# Altium PCB DS141-1.0循环式二氧化碳.PcbDoc
Units mm, origin at the board's own origin, x right, y up, seen from the top; angles counter-clockwise.
Board outline 42.01 x 51.21 mm, 2 copper layers (Top Layer, Bottom Layer), stack 1.581 mm thick; 36 components, 39 nets, 162 pads, 42 vias.
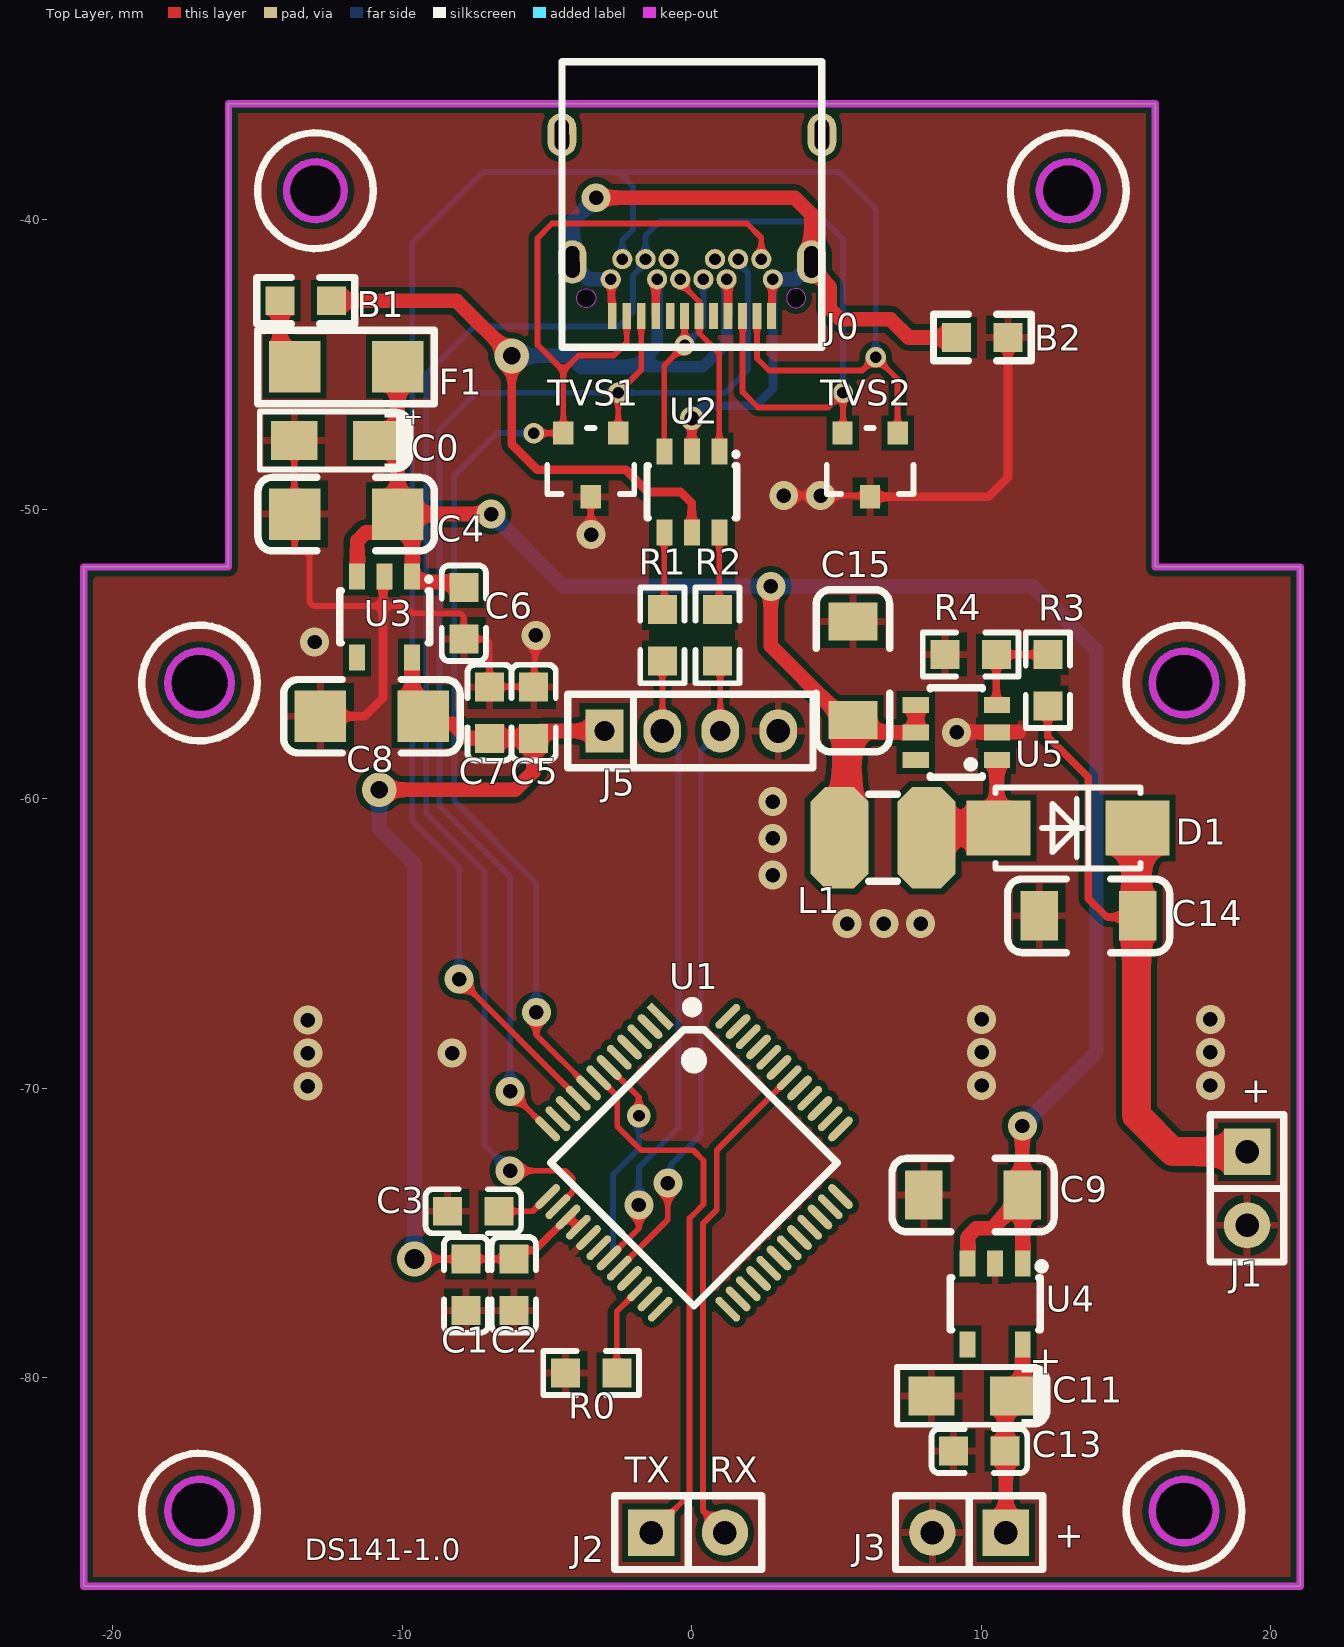
[diagram p0: Top Layer view]
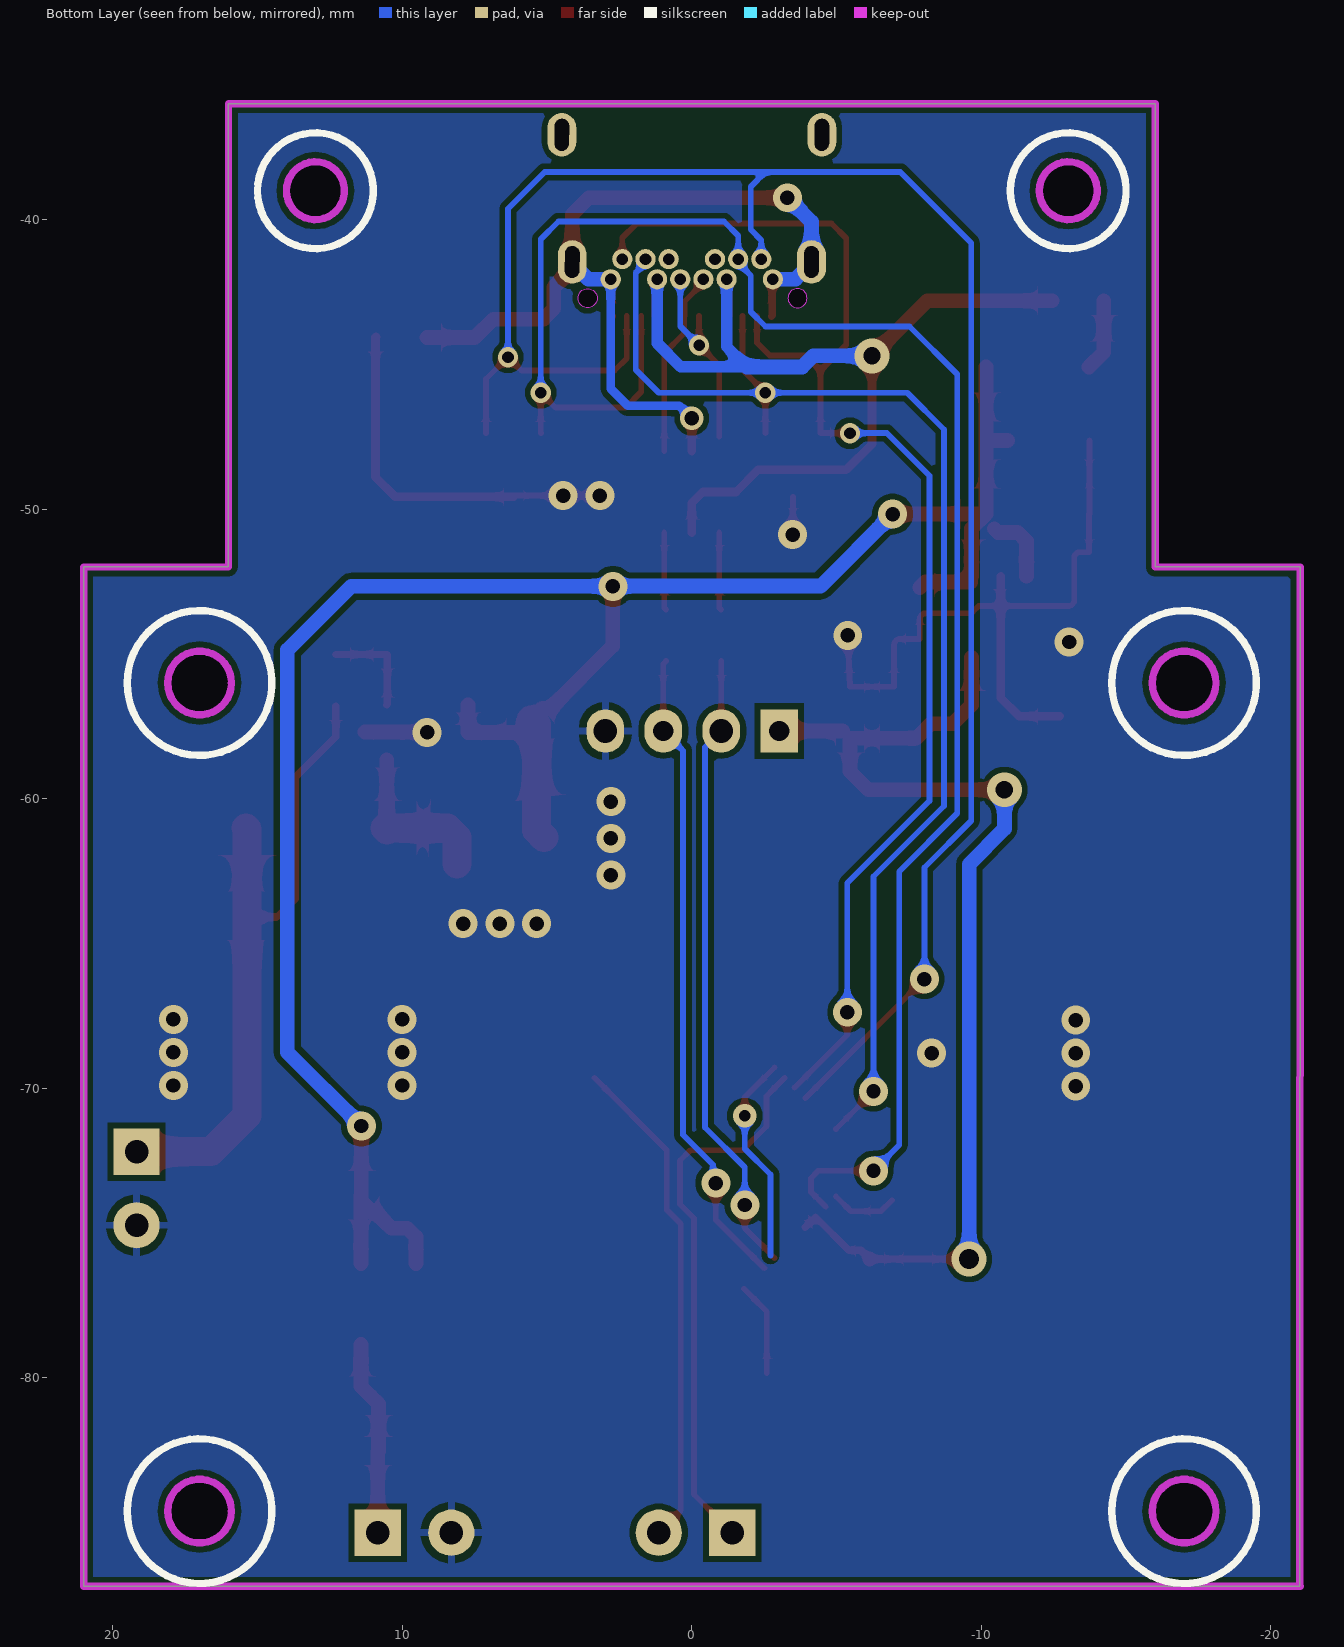
[diagram p1: Bottom Layer view, seen from below]
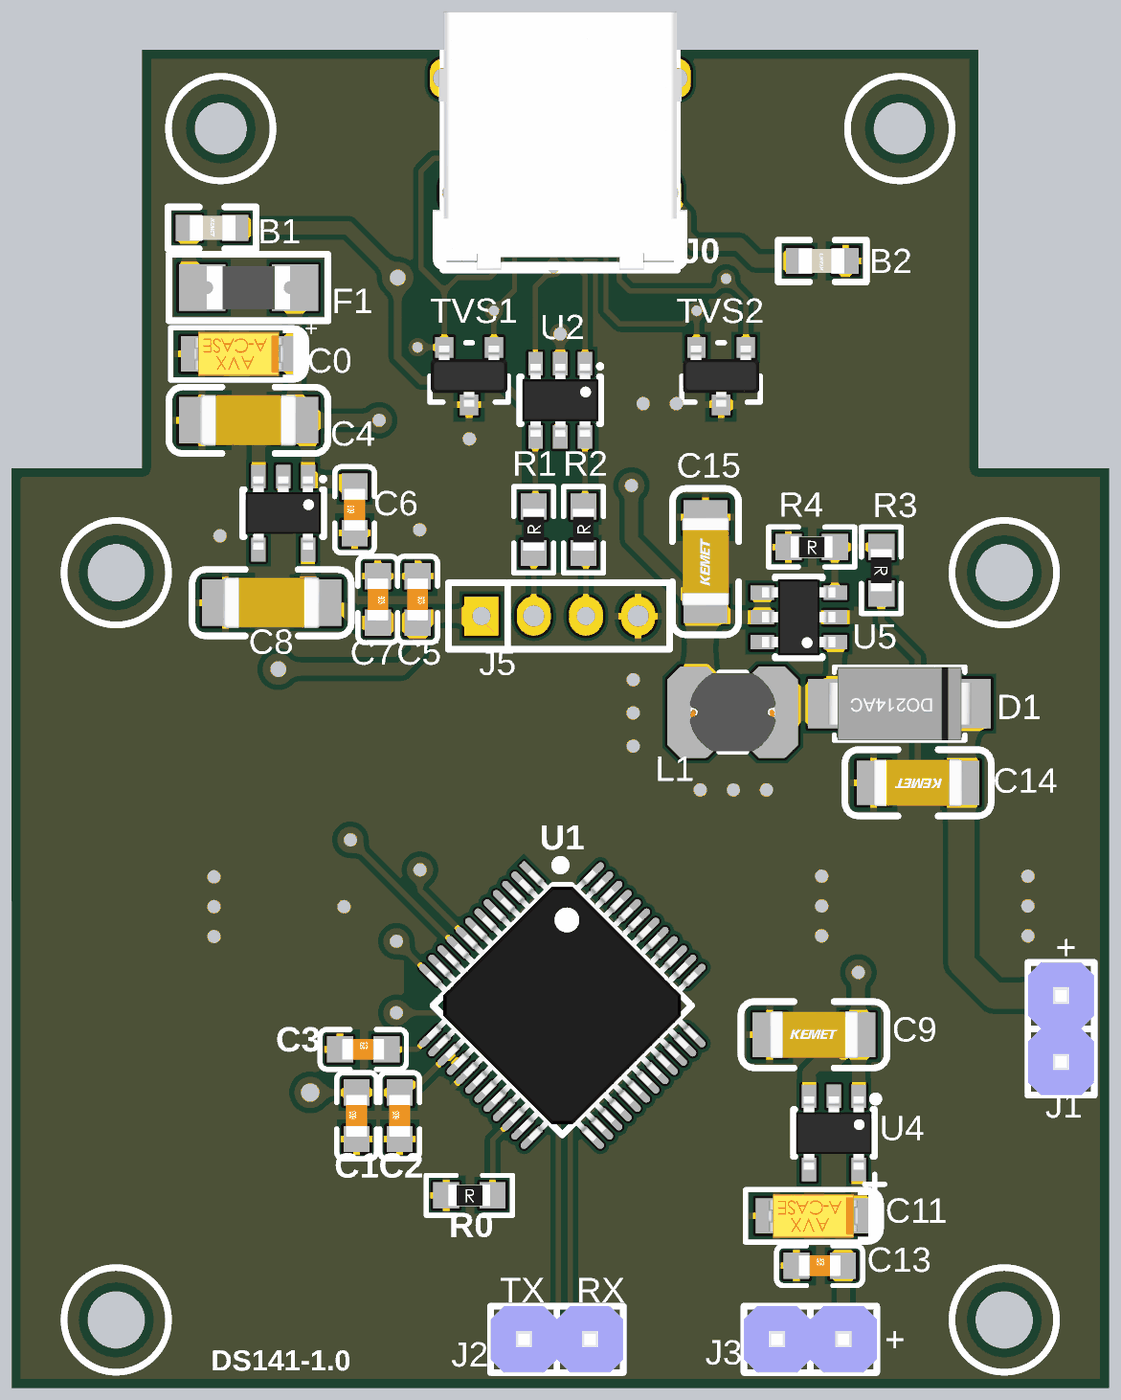
[diagram p2: 3D render of the assembled board from above, using the file's embedded part models]

## Layer stack, top to bottom
Top Solder: solder mask 0.0102, Solder Resist, Dk 3.5
Top Layer: signal copper 0.0356
Dielectric 1: dielectric 1.51, FR-4, Dk 4.8
Bottom Layer: signal copper 0.0356
Bottom Solder: solder mask 0.0102, Solder Resist, Dk 3.5

## Board outline
-21,-87.2 -21.006,-51.994 -16.002,-51.994 -16.002,-35.992 16.002,-35.992 16.002,-51.994 21.006,-51.994 21.006,-87.2
cut-out: 15.9,-84.6 ccw(c17,-84.6) 17,-85.7 ccw(c17,-84.6) 18.1,-84.6 ccw(c17,-84.6) 17,-83.5 ccw(c17,-84.6)
cut-out: 12,-39 ccw(c13,-39) 13,-40 ccw(c13,-39) 14,-39 ccw(c13,-39) 13,-38 ccw(c13,-39)
cut-out: -13,-40 ccw(c-13,-39) -12,-39 ccw(c-13,-39) -13,-38 ccw(c-13,-39) -14,-39 ccw(c-13,-39)
cut-out: -18.1,-84.6 ccw(c-17,-84.6) -17,-85.7 ccw(c-17,-84.6) -15.9,-84.6 ccw(c-17,-84.6) -17,-83.5 ccw(c-17,-84.6)
cut-out: 18.1,-56 ccw(c17,-56) 17,-54.9 ccw(c17,-56) 15.9,-56 ccw(c17,-56) 17,-57.1 ccw(c17,-56)
cut-out: -18.1,-56 cw(c-17,-56) -17,-54.9 cw(c-17,-56) -15.9,-56 cw(c-17,-56) -17,-57.1 cw(c-17,-56)

## Design rules (kind name [scope] priority, off if disabled: settings)
Clearance [All] p1: gap=0.2 ignorepadtopadclearanceinfootprint=TRUE
MinimumSolderMaskSliver [All] p1: minsoldermaskwidth=0.102
PolygonConnect GND [All] p1: thpad.connectstyle=Relief thpad.reliefconductorwidth=0.254 thpad.reliefentries=4 thpad.polygonreliefangle="90 Angle" thpad.airgapwidth=0.254 smdpad.connectstyle=Relief smdpad.reliefconductorwidth=0.254 smdpad.reliefentries=4 smdpad.polygonreliefangle="90 Angle" smdpad.airgapwidth=0.254 via.connectstyle=Direct via.reliefconductorwidth=0.254 via.reliefentries=4 via.polygonreliefangle="90 Angle" via.airgapwidth=0.254
PolygonConnect VSS [InNet('VSS') vs InNet('VSS')] p2: thpad.connectstyle=Relief thpad.reliefconductorwidth=0.508 thpad.reliefentries=4 thpad.polygonreliefangle="90 Angle" thpad.airgapwidth=0.254 smdpad.connectstyle=Relief smdpad.reliefconductorwidth=0.508 smdpad.reliefentries=4 smdpad.polygonreliefangle="90 Angle" smdpad.airgapwidth=0.254 via.connectstyle=Direct via.reliefconductorwidth=0.508 via.reliefentries=4 via.polygonreliefangle="90 Angle" via.airgapwidth=0.254
RoutingVias [All] p1: holewidth=0.6 width=1 viastyle="Through Hole" minholewidth=0.4 minwidth=0.8 maxholewidth=1 maxwidth=2
SilkToSilkClearance [All] p1: silktosilkclearance=0.025
SilkToSolderMaskClearance [IsPad] p1: minsilkscreentomaskgap=0.025 clearancetoexposedcopper=TRUE
SolderMaskExpansion [All] p1: expansion=0.102 istentingtop=FALSE
Width [All] p1: maxlimit=1 minlimit=0.2 preferedwidth=0.2
27 further rules are at their usual default settings.

## Components (designator, comment, footprint, x,y, rotation, side; value= is the part's Value field where it differs from the comment)
B1 "CBM160808U102" 0603Bead -13.335,-42.799 r180 top
B2 "CBM160808U102" 0603Bead 10.033,-44.069 r0 top
C0 "AVX_10uF/16V ±10％(C106)" AVX_3216-18(1206)_SMD -12.319,-47.625 r180 top value=10uF
C1 "SMDCAP00013" 0603CAP -7.798,-76.785 r90 top locked value=100nF
C2 "SMDCAP00012" 0603CAP -6.147,-76.785 r90 top locked value=4.7uF
C3 "SMDCAP00015" 0603CAP -7.544,-74.244 r0 top locked value=1uF
C4 "MLCC 10uF 50V ±20％ 1206" 1206CAP#1 -11.938,-50.165 r0 top value=10uF
C5 "SMDCAP00013" 0603CAP -5.461,-57.022 r270 top value=100nF
C6 "SMDCAP00015" 0603CAP -7.874,-53.593 r90 top value=1uF
C7 "SMDCAP00015" 0603CAP -6.985,-57.022 r270 top value=1uF
C8 "MLCC 10uF 50V ±20％ 1206" 1206CAP#1 -11.049,-57.149 r0 top value=10uF
C9 "MLCC 10uF 50V ±20％ 1206" 1206CAP#2 9.715,-73.685 r0 top value=10uF
C11 "AVX_10uF/16V ±10％(C106)" AVX_3216-18(1206)_SMD 9.69,-80.62 r180 top value=10uF
C13 "SMDCAP00015" 0603CAP 9.931,-82.525 r0 top value=1uF
C14 "MLCC 22uF 50V ±20％ 1206" 1206CAP#2 13.7,-64.041 r180 top value=22uF
C15 "MLCC 22uF 50V ±20％ 1206" 1206CAP#2 5.563,-55.577 r90 top value=22uF
D1 "SMDDIODE06003" SMA/DO-214AC 12.992,-61.011 r0 top value=SS12
F1 "SMD1206-050C-16V" 1206FUSE -11.938,-45.085 r0 top value="16V /0.5A"
J0 "USB_Type_C_24P" USB_TYPE_C_24P_Receptacle 0,-40.2 r180 top locked
J1 "SL000000042" SIP2 19.177,-73.457 r270 top value=NDIR-CO2-PWR
J2 "SL000000042" SIP2 -0.127,-85.344 r0 top value=NDIR-CO2-DAT
J3 "SL000000042" SIP2 9.576,-85.344 r180 top value=Motor
J5 "DIP4单排直针  间距2mm 针长11mm 铜" H4 -3.016,-57.658 r0 top value=4P
L1 "CD32 10uH 3.5*3*2mm SMD" CD32 6.604,-61.341 r90 top value=10uH
R0 "Chip 0R 1/16W ±1％ 0603" 0603RES -3.48,-79.832 r0 top locked value=0R
R1 "Chip 22R 1/16W ±1％ 0603" 0603RES -1.016,-54.356 r90 top value=22R
R2 "Chip 22R 1/16W ±1％ 0603" 0603RES 0.889,-54.356 r90 top value=22R
R3 "Chip 180K 1/16W ±1％ 0603" 0603RES 12.294,-55.905 r270 top value=180K
R4 "SMDRES00056" 0603RES 9.627,-55.016 r0 top value=10K
TVS1 "MMBZ9V1A" SOT23 -3.49,-48.471 r180 top
TVS2 "MMBZ9V1A" SOT23 6.157,-48.471 r180 top
U1 "STC32G12K128_35I LQFP48" LQFP-48 0.076,-72.568 r315 top locked value=STC32G12K128
U2 "82400102" SOT23-6 0,-49.4 r180 top
U3 "ME6211C33M5G-N" SOT23-5 -10.607,-53.717 r180 top
U4 "ME6211C33M5G-N" SOT23-5 10.477,-77.445 r180 top
U5 "MT3608B" SOT23-6 9.133,-57.709 r90 top

## Footprints (in the part's own frame and the unit in brackets; to place one, negate y for a bottom-side part, rotate by r counter-clockwise, add the part's x,y. Pads: shape width x height; smd on the part's side, far side on the other; paste and mask are expansions set on the pad)
0603Bead [mm]
  rect 1x1 smd: 1(-0.889,0) 2(0.889,0)
  silkscreen extent -1.69,-0.8 1.69,0.8, body extent -0.9,-0.48 0.85,0.48, height 0.95
0603CAP [mm]
  rect 1x1 smd: 1(-0.889,0) 2(0.89,0)
  silkscreen extent -1.65,-0.76 1.65,0.76, body extent -0.8,-0.4 0.8,0.4, height 0.3
0603RES [mm]
  rect 1x1 smd: 1(-0.889,0) 2(0.889,0)
  silkscreen extent -1.65,-0.76 1.65,0.76, body extent -0.8,-0.41 0.8,0.41, height 0.51
1206CAP#1 [mil]
  rect 70x70 smd: 1(-70,0) 2(70,0)
  silkscreen extent -120,-50 120,50, body extent -73,-38 73,38, height 47
1206CAP#2 [mil]
  rect 51.18x66.93 smd: 1(-66.93,0) 2(66.93,0)
  silkscreen extent -110,-50 110,50, body extent -67,-35 67,35, height 71
1206FUSE [mil]
  rect 70x70 smd: 1(-70,0) 2(70,0)
  silkscreen extent -120,-50 120,50, body extent -63,-33 63,33, height 57
AVX_3216-18(1206)_SMD [mm]
  rect 1.6x1.35 smd: 1(-1.41,0) 2(1.41,0)
  silkscreen extent -2.6,-1 2.6,1, body extent -1.7,-0.84 1.7,0.84, height 1.71
CD32 [mm]
  oct 3.5x2 smd: 1(0,1.5) 2(0,-1.5)
  silkscreen extent -1.5,-0.5 1.5,0.5, body extent -1.5,-1.65 1.5,1.65, height 2.1
H4 [mm]
  rect 1.3x1.5 hole 0.7: 1(0,0)
  oval 1.3x1.5 hole 0.813: 2(2,0) 4(6,0)
  oval 1.3x1.5 hole 0.7: 3(4,0)
  silkscreen extent -1.27,-1.27 7.2,1.27
LQFP-48 [mm]
  rect 1.1x0.27 smd mask+0.08: 1(-4.4,2.75)
  oval 1.1x0.27 smd mask+0.08: 2(-4.4,2.25) 3(-4.4,1.75) 4(-4.4,1.25) 5(-4.4,0.75) 6(-4.4,0.25) 7(-4.4,-0.25) 8(-4.4,-0.75) 9(-4.4,-1.25) 10(-4.4,-1.75) 11(-4.4,-2.25) 12(-4.4,-2.75) 25(4.4,-2.75) 26(4.4,-2.25) 27(4.4,-1.75) 28(4.4,-1.25) 29(4.4,-0.75) 30(4.4,-0.25) 31(4.4,0.25) 32(4.4,0.75) 33(4.4,1.25) 34(4.4,1.75) 35(4.4,2.25) 36(4.4,2.75)
  oval 0.27x1.1 smd mask+0.08: 13(-2.75,-4.4) 14(-2.25,-4.4) 15(-1.75,-4.4) 16(-1.25,-4.4) 17(-0.75,-4.4) 18(-0.25,-4.4) 19(0.25,-4.4) 20(0.75,-4.4) 21(1.25,-4.4) 22(1.75,-4.4) 23(2.25,-4.4) 24(2.75,-4.4) 37(2.75,4.4) 38(2.25,4.4) 39(1.75,4.4) 40(1.25,4.4) 41(0.75,4.4) 42(0.25,4.4) 43(-0.25,4.4) 44(-0.75,4.4) 45(-1.25,4.4) 46(-1.75,4.4) 47(-2.25,4.4) 48(-2.75,4.4)
  silkscreen extent -3.95,-3.5 3.5,3.85, body extent -4.51,-4.5 4.5,4.5, height 1.54
SIP2 [mm]
  rect 1.6x1.6 hole 0.813: 1(-1.27,0)
  round 1.6 hole 0.813: 2(1.27,0)
  silkscreen extent -2.54,-1.27 2.54,1.27, body extent -2.54,-1.27 2.54,1.27, height 8.64
SMA/DO-214AC [mm]
  rect 2.2x1.9 smd: 1(-2.4,0) 2(2.4,0)
  silkscreen extent -2.5,-1.4 2.5,1.4, body extent -2.74,-1.4 2.74,1.4, height 2.28
SOT23 [mm]
  rect 0.7x0.8 smd: 1(-0.95,-1.1) 2(0.95,-1.1) 3(0,1.1)
  silkscreen extent -1.5,-1.27 1.5,1, body extent -1.46,-1.17 1.46,1.17, height 1
SOT23-5 [mm] "SOT-23/SC-74A; 5 Leads; Body 3.1 x 3 mm, inc. leads (LxW max)"
  rect 0.55x0.9 smd: 1(-0.95,-1.4) 2(0,-1.4) 3(0.95,-1.4) 4(0.95,1.4) 5(-0.95,1.4)
  silkscreen extent -1.59,-1.36 1.55,0.9, body extent -1.45,-1.4 1.45,1.4, height 1.45
SOT23-6 [mm] "SOT-23/SC-74A; 5 Leads; Body 3.1 x 3 mm, inc. leads (LxW max)"
  rect 0.55x0.9 smd: 1(-0.95,-1.4) 2(0,-1.4) 3(0.95,-1.4) 4(0.95,1.4) 5(0,1.4) 6(-0.95,1.4)
  silkscreen extent -1.59,-1.36 1.55,0.9, body extent -1.45,-1.4 1.45,1.4, height 1.45
USB_TYPE_C_24P_Receptacle [mm]
  oval 1x1.5 hole 0.5 slot 1.1 at 90.5 deg: 0(-4.49,-3.13) 0(-4.13,1.26) 0(4.13,1.26) 0(4.49,-3.13)
  rect 0.3x0.9 smd mask+0.1: A1(-2.75,3.13) A2(-2.25,3.13) A3(-1.75,3.13) A4(-1.25,3.13) A5(-0.75,3.13) A6(-0.25,3.13) A7(0.25,3.13) A8(0.75,3.13) A9(1.25,3.13) A10(1.75,3.13) A11(2.25,3.13) A12(2.75,3.13)
  round 0.7 hole 0.4: B1(2.8,1.86) B2(2.4,1.16) B3(1.6,1.16) B4(1.2,1.86) B5(0.8,1.16) B6(0.4,1.86) B7(-0.4,1.86) B8(-0.8,1.16) B9(-1.2,1.86) B10(-1.6,1.16) B11(-2.4,1.16) B12(-2.8,1.86)
  Keep-Out Layer board cut-out: 3.98,2.51 3.955,2.384 3.883,2.277 3.776,2.205 3.65,2.18 3.65,2.18 3.524,2.205 3.417,2.277 3.345,2.384 3.32,2.51 3.32,2.51 3.345,2.636 3.417,2.743 3.524,2.815 3.65,2.84 3.65,2.84 3.776,2.815 3.883,2.743 3.955,2.636 3.98,2.51
  Keep-Out Layer board cut-out: -3.93,2.51 -3.905,2.384 -3.833,2.277 -3.726,2.205 -3.6,2.18 -3.6,2.18 -3.474,2.205 -3.367,2.277 -3.295,2.384 -3.27,2.51 -3.27,2.51 -3.295,2.636 -3.367,2.743 -3.474,2.815 -3.6,2.84 -3.6,2.84 -3.726,2.815 -3.833,2.743 -3.905,2.636 -3.93,2.51
  silkscreen extent -4.48,-5.66 4.48,4.21, body extent -4.87,-5.66 4.88,4.21, height 3.36

## Part data
B1 B2: library part "Chip Ferrite Bead 0606", "贴片磁珠"
C0 C11: "钽电容"
C1 C5: library part "MLCC 100nF 50V ±10％ 0603", "贴片电容"
C2: library part "MLCC 4.7uF 50V ±10％ 0603", "贴片电容"
C3 C6 C7 C13: library part "MLCC 1uF 50V ±10％ 0603", "贴片电容"
C4 C8 C9 C14 C15: "贴片电容"
D1: library part "SS12 SMA/DO-214AC（1N5817）", "贴片肖特基二极管"
F1: "贴片自恢复保险丝 16V /0.5A"
J1 J2 J3: library part "DIP2 单排直针 1*40P 间距2.54mm 针长11mm 铜", "单排直针"
J5: "单排直针"
L1: "贴片电感"
R0 R1 R2 R3: "贴片电阻"
R4: library part "Chip 10K 1/16W ±1％ 0603", "贴片电阻"
TVS1 TVS2: library part TVS, "瞬态抑制二极管"
U1: "单片机芯片"
U2: "瞬态抑制二极管(TVS)"
U3 U4: "稳压芯片"
U5: "MT3608B 是一款高效的1.2MHz固定频率电流模式升压转换器。"

## Via types
v1: diameter 1, hole 0.5, Top Layer to Bottom Layer, tented both sides, 32 vias
v2: diameter 0.7, hole 0.4, Top Layer to Bottom Layer, tented both sides, 5 vias
v3: diameter 1.2, hole 0.6, Top Layer to Bottom Layer, tented both sides, 2 vias
v4: diameter 0.813, hole 0.406, Top Layer to Bottom Layer, tented both sides, 1 vias
v5: diameter 1.2, hole 0.7, Top Layer to Bottom Layer, tented both sides, 1 vias
v6: diameter 0.8, hole 0.5, Top Layer to Bottom Layer, tented both sides, 1 vias

## Nets (pads, with @x,y where several pads share a name; then routed paths per layer and width w, separated by ;. In a path a pad name is that pad's centre, name@x,y a point inside that pad or via, vN(x,y) a via of type N, cw(c..) or ccw(c..) an arc to the next point about the centre after c; other vN are vias at no path point)
ADC0: U1.5
ADC1: U1.6 | length 7.3
  Top Layer w0.2: U1.6 -1.829,-70.31 v4(-1.829,-70.942)
  Bottom Layer w0.2: -2.718,-75.768 -2.718,-72.974 -1.829,-72.085 v4(-1.829,-70.942)
D+_I/O1: J0.A6 J0.B6 U2.1 | length 6.5
  Top Layer w0.2: J0.B6 -0.4,-42.179 0.25,-42.829 J0.A6 0.266,-43.346 0.266,-43.93 0.95,-44.613 U2.1
D-_I/O2: J0.A7 J0.B7 U2.3 | length 7
  Top Layer w0.2: -0.95,-47.498 -0.95,-45.032 v2(-0.25,-44.332) J0.A7
  Bottom Layer w0.2: v2(-0.25,-44.332) 0.4,-43.682 J0.B7
DAC_OUT: U1.10
Dis1_red_EN: U1.35
Dis2_green_EN: U1.34
Dis3_blue_EN: U1.36
GND: B2.2 C0.2 C1.1 C2.1 C3.1 C4.1 C5.1 C6.1 C7.1 C8.1 C9.1 C11.2 C13.1 C14.2 C15.2 J1.2 J3.2 J5.4 R0.1 R4.1 TVS1.3 TVS2.3 U1.17 U3.2 U4.2 U5.2 | length 40.7
  Top Layer w0.2: C0.2 -13.729,-50.152 C4.1 -13.716,-51.486 -13.325,-51.486 -13.208,-51.603 -13.208,-53.14 ccw(c-13.008,-53.14) -13.008,-53.34 -10.668,-53.34 -9.906,-53.34 -9.711,-53.535 ccw(c-9.569,-53.394) -9.569,-53.594 -8.074,-53.594 cw(c-8.074,-53.794) -7.874,-53.794 C6.1 -7.185,-54.482 cw(c-7.185,-54.682) -6.985,-54.682 C7.1 C5.1 -5.444,-55.733 cw(c-5.244,-55.733) -5.444,-55.726 v1(-5.385,-54.356) ; TVS1.3 -3.49,-50.866 v1(-3.48,-50.876) ; v1(3.175,-49.53) v1(4.445,-49.53) 6.116,-49.53 TVS2.3
  Top Layer w0.3: C8.1@-12.7,-57.15 -11.303,-57.15 -10.668,-56.515 -10.668,-53.34 U3.2@-10.668,-52.317 ; TVS2.3 10.246,-49.571 10.922,-48.895 B2.2 B2.2@10.905,-44.052
  Top Layer w0.508: v1@9.38,-57.694 11.288,-57.694
  other v1: -13.259,-69.926 10.008,-69.901 17.907,-69.901 -13.259,-68.783 -8.28,-68.783 10.008,-68.758 17.907,-68.758 -13.259,-67.64 10.008,-67.615 17.907,-67.615 5.359,-64.313 6.629,-64.313 7.899,-64.313 2.794,-62.636 2.794,-61.366 2.794,-60.096 9.144,-57.709 -13.03,-54.585
I2C1_SCL: U1.38
I2C1_SDA: U1.37
KEY_HOME: U1.21
NetB1_2: B1.2 F1.1 | length 2.5
  Top Layer w0.508: B1.2 -14.224,-44.577 F1.1
NetD1_1: D1.1 L1.2 U5.1 | length 6
  Top Layer w0.508: D1.1@10.533,-61.011 U5.1
  Top Layer w1: L1.2@8.104,-62.257 L1.2 8.434,-61.011 10.533,-61.011 D1.1 D1.1@10.533,-61.069
NetR3_1: R3.1 R4.2 U5.3 | length 3.5
  Top Layer w0.254: U5.3 10.516,-56.741 R4.2 R3.1
P3.0/D-/RxD: J5.2 R1.1 U1.19 | length 21.8
  Top Layer w0.2: U1.19 -1.829,-74.827 v1(-1.829,-74.027) ; J5.2 R1.1
  Bottom Layer w0.2: v1(-1.829,-74.027) -1.829,-72.72 -0.457,-71.349 -0.457,-58.217 J5.2
P3.1/D+/TxD: J5.3 R2.1 U1.20 | length 22.4
  Top Layer w0.2: U1.20 -0.829,-74.534 v1(-0.829,-73.271) ; R2.1 0.984,-55.34 J5.3
  Bottom Layer w0.2: v1(-0.829,-73.271) -0.73,-73.173 -0.73,-72.638 0.305,-71.603 0.305,-58.337 J5.3
P3.3: R0.2 U1.22 | length 3.2
  Top Layer w0.2: R0.2 -2.591,-77.71 U1.22
PWM: U1.33
SPI1/SPI2_CS: J0.A3 J0.B3 TVS2.2 U1.14 | length 63.4
  Top Layer w0.2: v1(-6.274,-72.847) -4.369,-72.847 -4.115,-73.101 -4.115,-73.577 U1.14 ; J0.A3 1.75,-45.946 2.286,-46.482 4.713,-46.482 v2(5.221,-45.974) 5.221,-47.357 TVS2.2
  Bottom Layer w0.2: v1(-6.274,-72.847) -7.163,-71.958 -7.163,-62.509 -9.169,-60.503 -9.169,-45.339 -7.518,-43.688 -2.54,-43.688 -2.032,-43.18 -2.032,-41.927 J0.B3@-1.6,-41.495 ; J0.B3 -1.6,-40.551 -1.11,-40.061 4.605,-40.061 5.221,-40.677 v2(5.221,-45.974)
SPI1_MISO: J0.A11 J0.B11 TVS1.2 U1.8 | length 46.9
  Top Layer w0.2: v2(-5.461,-47.371) TVS1.2 -4.44,-45.217 ; v1(-5.37,-67.371) -5.37,-68.153 U1.8@-3.55,-69.972 ; J0.A11 -2.25,-44.249 -2.694,-44.693 -3.916,-44.693 -4.44,-45.217 ; J0.B11 2.4,-40.627 1.905,-40.132 -4.826,-40.132 -5.334,-40.64 -5.334,-44.323 -4.44,-45.217
  Bottom Layer w0.2: v2(-5.461,-47.371) -6.731,-47.371 -8.204,-48.844 -8.204,-60.071 -5.37,-62.905 v1(-5.37,-67.371)
SPI1_MOSI: J0.A10 J0.B10 TVS1.1 U1.12 | length 45.5
  Top Layer w0.2: v1(-6.274,-70.107) U1.12 ; TVS1.1 v2(-2.54,-45.974) -1.75,-45.184 J0.A10
  Bottom Layer w0.2: v1(-6.274,-70.107) -6.274,-62.687 -8.712,-60.249 -8.712,-47.244 -7.442,-45.974 v2(-2.54,-45.974) 1.143,-45.974 1.938,-45.179 1.938,-41.833 1.6,-41.495 J0.B10
SPI1_SCK: J0.A2 J0.B2 TVS2.1 U1.9 | length 66.8
  Top Layer w0.2: v1(-8.034,-66.226) U1.9 ; J0.A2 2.25,-44.795 2.667,-45.212 5.884,-45.212 v2(6.35,-44.746) 7.107,-45.503 TVS2.1
  Bottom Layer w0.2: v1(-8.034,-66.226) -8.034,-62.375 -9.652,-60.757 -9.652,-40.806 -7.2,-38.354 -2.54,-38.354 ; J0.B2 -2.4,-40.707 -2.032,-40.339 -2.032,-38.862 -2.54,-38.354 ; v2(6.35,-44.746) 6.35,-39.624 5.08,-38.354 -2.54,-38.354
SPI2_MISO: U1.29
SPI2_MOSI: U1.18
SPI2_SCK: U1.31
UCAP: C3.2 U1.13 | length 2.3
  Top Layer w0.2: C3.2@-6.909,-73.863 -6.528,-74.244 -5.489,-74.244 U1.13
USART2_RXD: U1.27
USART2_RXD2: J2.2 U1.42 | length 17.3
  Top Layer w0.2: J2.2 0.381,-84.582 0.381,-74.676 0.864,-74.193 0.864,-72.134 U1.42
USART2_TXD: U1.28
USART2_TXD2: J2.1 U1.7 | length 19
  Top Layer w0.2: U1.7 -2.575,-70.27 -2.575,-71.313 -1.753,-72.136 0.051,-72.136 0.406,-72.492 0.406,-74.004 0.058,-74.353 -0.076,-74.487 -0.076,-84.023 J2.1
USB_D+: R2.2 U2.6 | length 2.7
  Top Layer w0.2: R2.2 0.95,-53.406 U2.6
USB_D-: R1.2 U2.4 | length 2.7
  Top Layer w0.2: R1.2 -0.95,-53.401 U2.4
VBUS: B1.1 J0.A4 J0.A9 J0.B4 J0.B9 U2.5 | length 34.1
  Top Layer w0.254: J0.A9 J0.A9@-1.227,-43.307 ; J0.B4@-1.227,-42.087 J0.B4 ; J0.B9 J0.B9@1.227,-42.087
  Top Layer w0.3: v3(-6.223,-44.704) -6.223,-47.752 -5.334,-48.641 -2.286,-48.641 -1.524,-49.403 -0.381,-49.403 0,-49.784 U2.5 ; J0.A9 J0.B4@-1.25,-42.11 ; J0.A4 J0.B9@1.25,-42.11
  Top Layer w0.508: B1.1 -8.128,-42.799 v3(-6.223,-44.704)
  Bottom Layer w0.4: J0.B4 -1.2,-44.38 -1.905,-45.085 0.381,-45.085 1.2,-44.266 J0.B9
  Bottom Layer w0.508: v3(-6.223,-44.704) -4.191,-44.704 -3.81,-45.085 -1.905,-45.085
VCC_3V3_MCU: C1.2 C2.2 C5.2 C7.2 C8.2 J5.1 U1.15 U1.16 U3.5 | length 38.7
  Top Layer w0.24: v5(-9.576,-75.895) C1.2 C2.2
  Top Layer w0.254: C2.2 -5.842,-75.59 -5.421,-75.59 U1.15 U1.16
  Top Layer w0.3: C5.2 C5.2@-5.207,-57.658
  Top Layer w0.508: v3(-10.795,-59.69) -6.096,-59.69 -5.461,-59.055 C5.2 C7.2 -7.747,-57.912 -8.255,-57.404 -9.016,-57.404 C8.2 -9.657,-56.763 U3.5 ; C5.2@-5.207,-57.658 J5.1
  Bottom Layer w0.508: v3(-10.795,-59.69) -10.795,-61.036 -9.576,-62.255 v5(-9.576,-75.895)
VCC_3V3_MOTOR: C11.1 C13.2 J3.1 U4.5 | length 6.8
  Top Layer w0.508: J3.1@10.821,-85.726 J3.1@10.846,-85.75 ; J3.1 10.846,-82.549 C13.2 10.821,-80.898 C11.1 11.427,-80.292 U4.5
VCC_5V: C0.1 C4.2 C6.2 C9.2 C15.1 F1.2 L1.1 U3.1 U3.3 U4.1 U4.3 U5.4 U5.5 | length 77.7
  Top Layer w0.508: U3.3 -11.557,-51.098 -11.259,-50.8 -10.571,-50.8 C4.2@-10.444,-50.673 ; C0.1 C0.1@-10.16,-47.625 ; F1.2 C0.1@-10.16,-47.625 ; U3.1 -9.657,-50.668 C4.2 ; U3.1@-9.636,-52.513 -8.064,-52.513 C6.2 ; v1(-6.934,-50.165) C4.2 ; v1(2.727,-52.661) 2.727,-54.721 4.887,-56.881 5.167,-56.881 C15.1 5.994,-57.709 U5.5 U5.4 ; U4.3 9.527,-75.126 9.825,-74.828 10.379,-74.828 10.926,-74.281 11.019,-74.281 C9.2@11.415,-73.885 ; v1(11.415,-71.3) C9.2 11.427,-73.697 U4.1 ; C4.2 C0.1@-10.16,-47.625
  Top Layer w1: L1.1 5.359,-61.086 5.359,-57.427 5.509,-57.277 C15.1
  Bottom Layer w0.508: v1(-6.934,-50.165) -4.445,-52.654 v1@2.727,-52.654 ; v1(2.727,-52.661) 11.767,-52.661 13.97,-54.864 13.97,-68.745 v1(11.415,-71.3)
VCC_12V_BOOST: C14.1 D1.2 J1.1 R3.2 | length 23.4
  Top Layer w0.254: R3.2 12.294,-57.861 13.692,-59.259 13.692,-63.45 14.326,-64.084 C14.1@15.357,-64.084
  Top Layer w1: D1.2 15.357,-61.045 15.357,-64.084 15.357,-70.932 16.612,-72.187 J1.1
VSS: B2.1 J0.0@4.13,-41.46 J0.0@-4.13,-41.46 J0.A1 J0.A12 J0.B1 J0.B12 U2.2 | length 32.5
  Top Layer w0.254: J0.B1 -2.773,-42.087 -2.773,-43.307 J0.A12 ; J0.A1 2.773,-43.307 2.773,-42.087 J0.B12
  Top Layer w0.3: U2.2 v6(0,-46.857)
  Top Layer w0.508: v1@-3.434,-39.243 3.556,-39.243 4.13,-39.817 4.13,-41.697 4.764,-42.331 4.764,-43.075 5.124,-43.434 6.858,-43.434 7.493,-44.069 B2.1
  Bottom Layer w0.3: v6(0,-46.857) 0.433,-46.424 2.217,-46.424 2.8,-45.841 J0.B12
  Bottom Layer w0.508: J0.0@-4.13,-41.46 -4.13,-40.071 v1(-3.302,-39.243) ; J0.0@-4.123,-41.515 -3.578,-42.06 J0.B1 ; J0.B12 3.578,-42.06 J0.0@4.123,-41.515
pads on no net: J0.0@4.49,-37.07 J0.0@-4.49,-37.07 J0.A5 J0.A8 J0.B5 J0.B8 U1.1 U1.2 U1.3 U1.4 U1.11 U1.23 U1.24 U1.25 U1.26 U1.30 U1.32 U1.39 U1.40 U1.41 U1.43 U1.44 U1.45 U1.46 U1.47 U1.48 U3.4 U4.4 U5.6

## Polygon pours and split planes (outlines as drawn)
GND on Bottom Layer "GND_L02_P000" (solid, remove dead copper, pour order 0): 20.996,-87.19 20.996,-51.994 16.012,-51.994 16.002,-51.984 16.002,-35.992 -16.002,-35.992 -16.002,-51.991 -16.004,-51.994 -20.985,-51.994 -20.996,-52.004 -20.996,-87.196 -21,-87.2
GND on Top Layer "GND_L01_P001" (solid, remove dead copper, pour order 1): 20.996,-87.19 20.996,-51.994 16.012,-51.994 16.002,-51.984 16.002,-35.992 -16.002,-35.992 -16.002,-51.991 -16.004,-51.994 -20.985,-51.994 -20.996,-52.004 -20.996,-87.196 -21,-87.2

## Keep-outs
Keep-Out Layer:
  circle w0.254: c-17,-56 r1.1
  circle w0.254: c17,-56 r1.1
  circle w0.254: c-17,-84.6 r1.1
  circle w0.254: c17,-84.6 r1.1
  circle w0.254: c-13,-39 r1
  circle w0.254: c13,-39 r1
  lines w0.254: -21.006,-87.2 21.006,-87.2 21.006,-51.994 16.002,-51.994 16.002,-35.992 -16.002,-35.992 -16.002,-51.994 -21.006,-51.994 ; -21.006,-51.994 -21,-87.2 -21.006,-51.994

## Other copper
Top Layer:
  pour cut-out: -1.915,-48.327 -1.539,-48.704 1.479,-48.704 1.479,-55.999 -1.479,-55.999 -1.479,-48.943 -1.95,-48.472
  pour cut-out: 12.725,-57.277 12.725,-54.508 10.058,-54.508 10.109,-54.559 10.109,-57.302
  pour cut-out: -5.999,-70.814 -5.983,-70.831 -5.983,-72.145 -4.474,-73.653 -3.797,-73.653 -2.442,-75.008 -2.222,-74.787 -1.138,-73.703 -1.138,-72.442 -1.139,-72.442 -3.008,-70.572
  pour cut-out: -0.824,-44.14 -0.824,-48.049 -1.479,-48.704 -1.899,-48.284 -5.186,-48.284 -5.378,-48.092 -4.911,-47.625 -3.937,-47.625 -3.937,-45.147 -2.824,-44.034 -0.894,-44.034
  pour cut-out: -5.9,-74.55 -5.302,-74.55 -5.286,-74.534 -5.15,-74.669 -5.15,-74.848 -5.871,-75.569 -8.777,-75.569 -9.257,-75.089 -8.896,-75.089 -8.806,-74.998 -7.171,-74.998 -7.163,-75.006 -7.163,-74.752

## Silkscreen, mask and mechanical layers (free items; w line width, h text height)
Top Overlay:
  circle w0.254: c13,-39 r2
  circle w0.254: c-13,-39 r2
  circle w0.254: c17,-84.6 r2
  circle w0.254: c-17,-84.6 r2
  circle w0.254: c17,-56 r2
  circle w0.254: c-17,-56 r2
  text "+" at 18.974,-70.795 h1.52
  text "TX" at -2.311,-83.922 h1.52
  text "RX" at 0.61,-83.922 h1.52
  text "+" at 12.364,-84.963 h1.52 r270
  text "DS141-1.0" at -13.372,-86.538 h1.27
Bottom Overlay:
  circle w0.254: c13,-39 r2
  circle w0.254: c-13,-39 r2
  circle w0.254: c17,-84.6 r2.5
  circle w0.254: c-17,-84.6 r2.5
  circle w0.254: c17,-56 r2.5
  circle w0.254: c-17,-56 r2.5
Mechanical 1:
  circle w0.254: c13,-39 r1
  circle w0.254: c-13,-39 r1
  circle w0.254: c17,-84.6 r1.1
  circle w0.254: c-17,-84.6 r1.1
  circle w0.254: c17,-56 r1.1
  circle w0.254: c-17,-56 r1.1
  lines w0.254: -21.006,-87.2 21.006,-87.2 21.006,-51.994 16.002,-51.994 16.002,-35.992 -16.002,-35.992 -16.002,-51.994 -21.006,-51.994 ; -21.006,-51.994 -21,-87.2 -21.006,-51.994

## Text inside footprints (layer, text, board x,y; h text height)
C0: Top Overlay "+" at -9.271,-46.355 h1 r180
C11: Top Overlay "+" at 12.79,-79.02 h1 r180